# EAGLE board eCard (EAGLE 9.5.2)
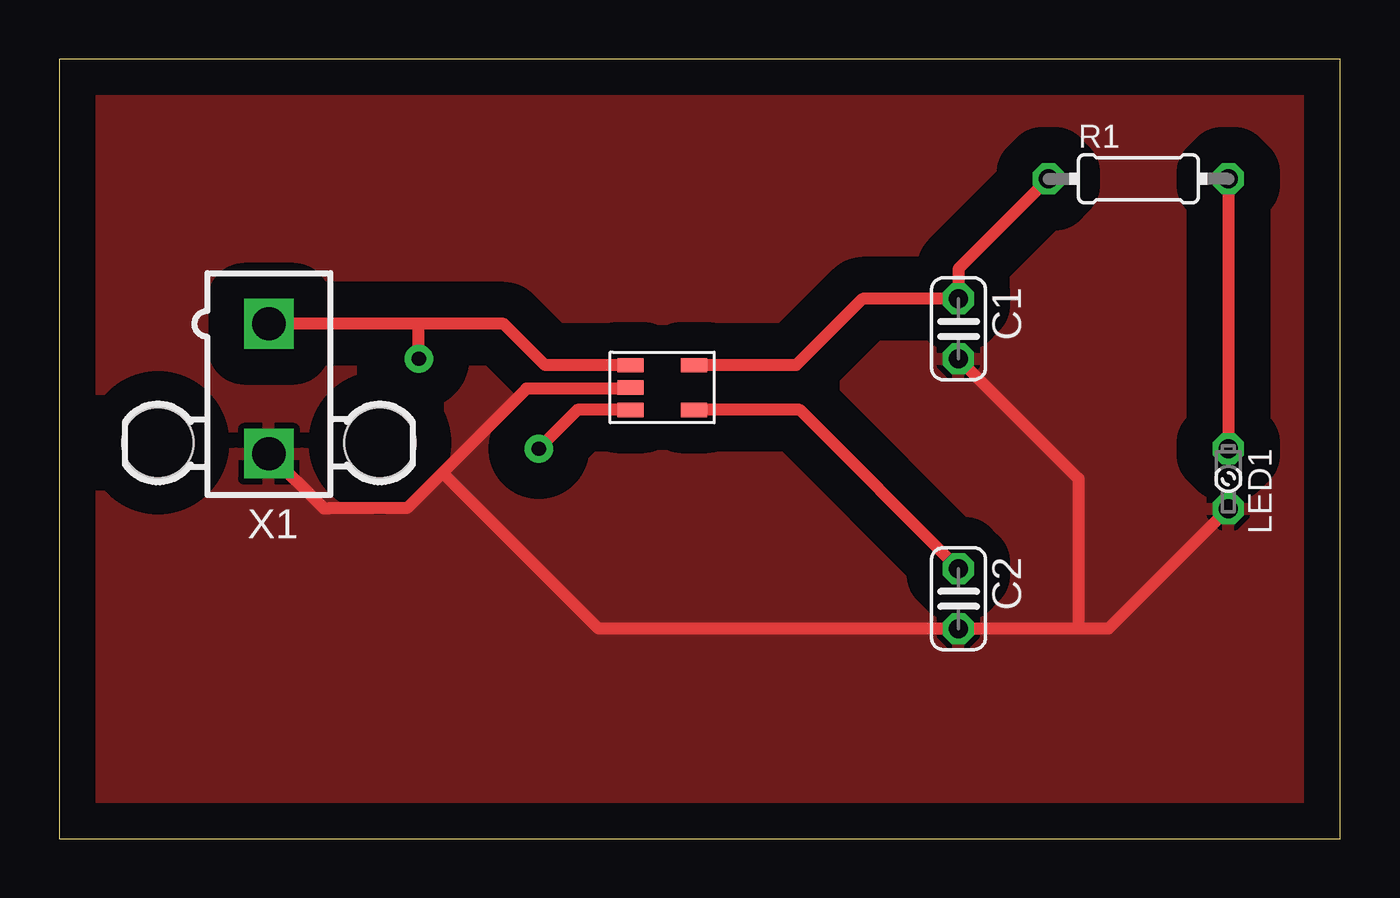
[diagram p0: board, top side]
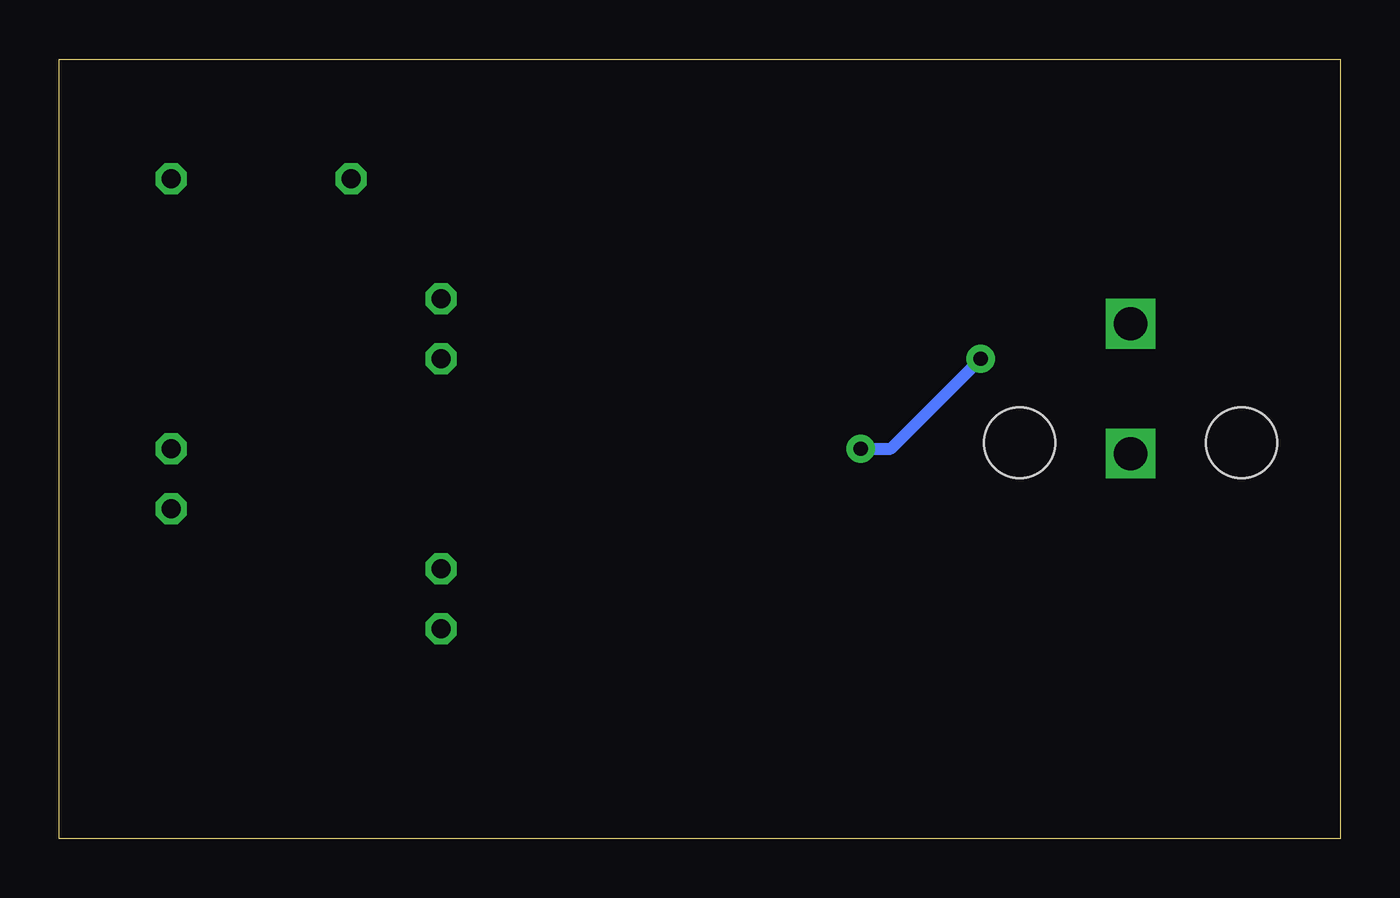
[diagram p1: board, bottom side, seen from below]

Size 54.28 x 33.01 mm. Coordinates in mm from the lower left corner, seen from the top.
Outline: 0,0 54.28,0 54.28,33.01 0,33.01 0,0
Copper layers (1*16): Top 0.035mm / dielectric 1.5mm / Bottom 0.035mm
Design rules "MWSEagleDesignRules3 *": minimum track width 10mil, minimum drill 22mil, track to track 10mil, track to pad 10mil, pad to pad 10mil, via to via 10mil, smd to smd 10mil, copper to edge 10mil, drill to drill 8mil, minimum pad ring 10mil, minimum via ring 8mil, stop-mask expansion 4mil, vias tented up to drill 0mil, thermal gap 10mil

## Footprints (pad centres in the part's own frame; a part is rotated, then mirrored left to right if it is on the bottom)
C025-024X044 = drill 0.813 octagon: 1 -1.27,0; 2 1.27,0
LSU260 = drill 0.813 octagon: A -1.27,0; K 1.27,0
0204/7 = drill 0.813 octagon: 1 -3.81,0; 2 3.81,0
TPS799 = smd 1.1 x 0.6: 1 -1.2,1; 2 -1.2,0.05; 3 -1.2,-0.9; 4 1.5,-0.9; 5 1.5,1
5566-2 = drill 1.4 square: 1 0,-2.75; 2 0,2.75 | hole 3: 4.7,2.29; -4.7,2.29

## Placement (x,y rotation side)
C1  2.2uF  [C025-024X044]  38.1,21.59 270 top
C2  0.01uF  [C025-024X044]  38.1,10.16 270 top
LED1  green  [LSU260]  49.53,15.24 270 top
R1  100  [0204/7]  45.72,27.94 0 top
U$1  TPS799  [TPS799]  25.4,19.05 0 top
X1  5566-2  [5566-2]  8.89,19.05 180 top

## Library data of the parts
C1 C2 = rcl; SPICEPREFIX: C
LED1 = led
R1 = rcl; SPICEPREFIX: R
U$1 = TPS799
X1 = con-molex; MF: MOLEX; OC_FARNELL: 1822072; OC_NEWARK: unknown

## Nets
5V_IN: U$1.1 U$1.3 X1.1
GND: C1.2 C2.2 LED1.K U$1.2 X1.2
NR: C2.1 U$1.4
OUT: C1.1 R1.1 U$1.5
R1_LED1: LED1.A R1.2

## Tracks (layer width: path | path; a pad name or v marks a point on that pad's centre or on a via)
5V_IN  (via drill 0.6)
  Top 0.508: U$1.1 20.59,20.05 18.84,21.8 15.24,21.8 | 15.24,21.8 X1.1 | U$1.3 21.96,18.15 v20.32,16.51 | v15.24,20.32 15.24,21.8
  Bottom 0.508: v20.32,16.51 19.05,16.51 v15.24,20.32
GND
  Top 0.508: LED1.K 44.45,8.89 43.18,8.89 | 43.18,8.89 C2.2 22.86,8.89 16.25,15.5 | C1.2 43.18,15.24 43.18,8.89 | U$1.2 24.15,19.05 19.8,19.05 16.25,15.5 | 16.25,15.5 14.74,13.99 11.45,13.99 11.43,13.97 11.22,13.97 X1.2
  pour Top (isolate 1.524): -1.27,34.29 -1.27,-1.27 55.88,-1.27 55.88,34.29
NR
  Top 0.508: C2.1 31.38,18.15 U$1.4
OUT
  Top 0.508: R1.1 38.1,24.13 C1.1 34.04,22.86 31.23,20.05 U$1.5
R1_LED1
  Top 0.508: R1.2 LED1.A